# Altium PCB Zigbee.PcbDoc
Units mm, origin at the board's own origin, x right, y up, seen from the top; angles counter-clockwise.
Board outline 41.78 x 49.15 mm, 2 copper layers (Top Layer, Bottom Layer); 2 components, 9 nets, 26 pads, 6 vias.
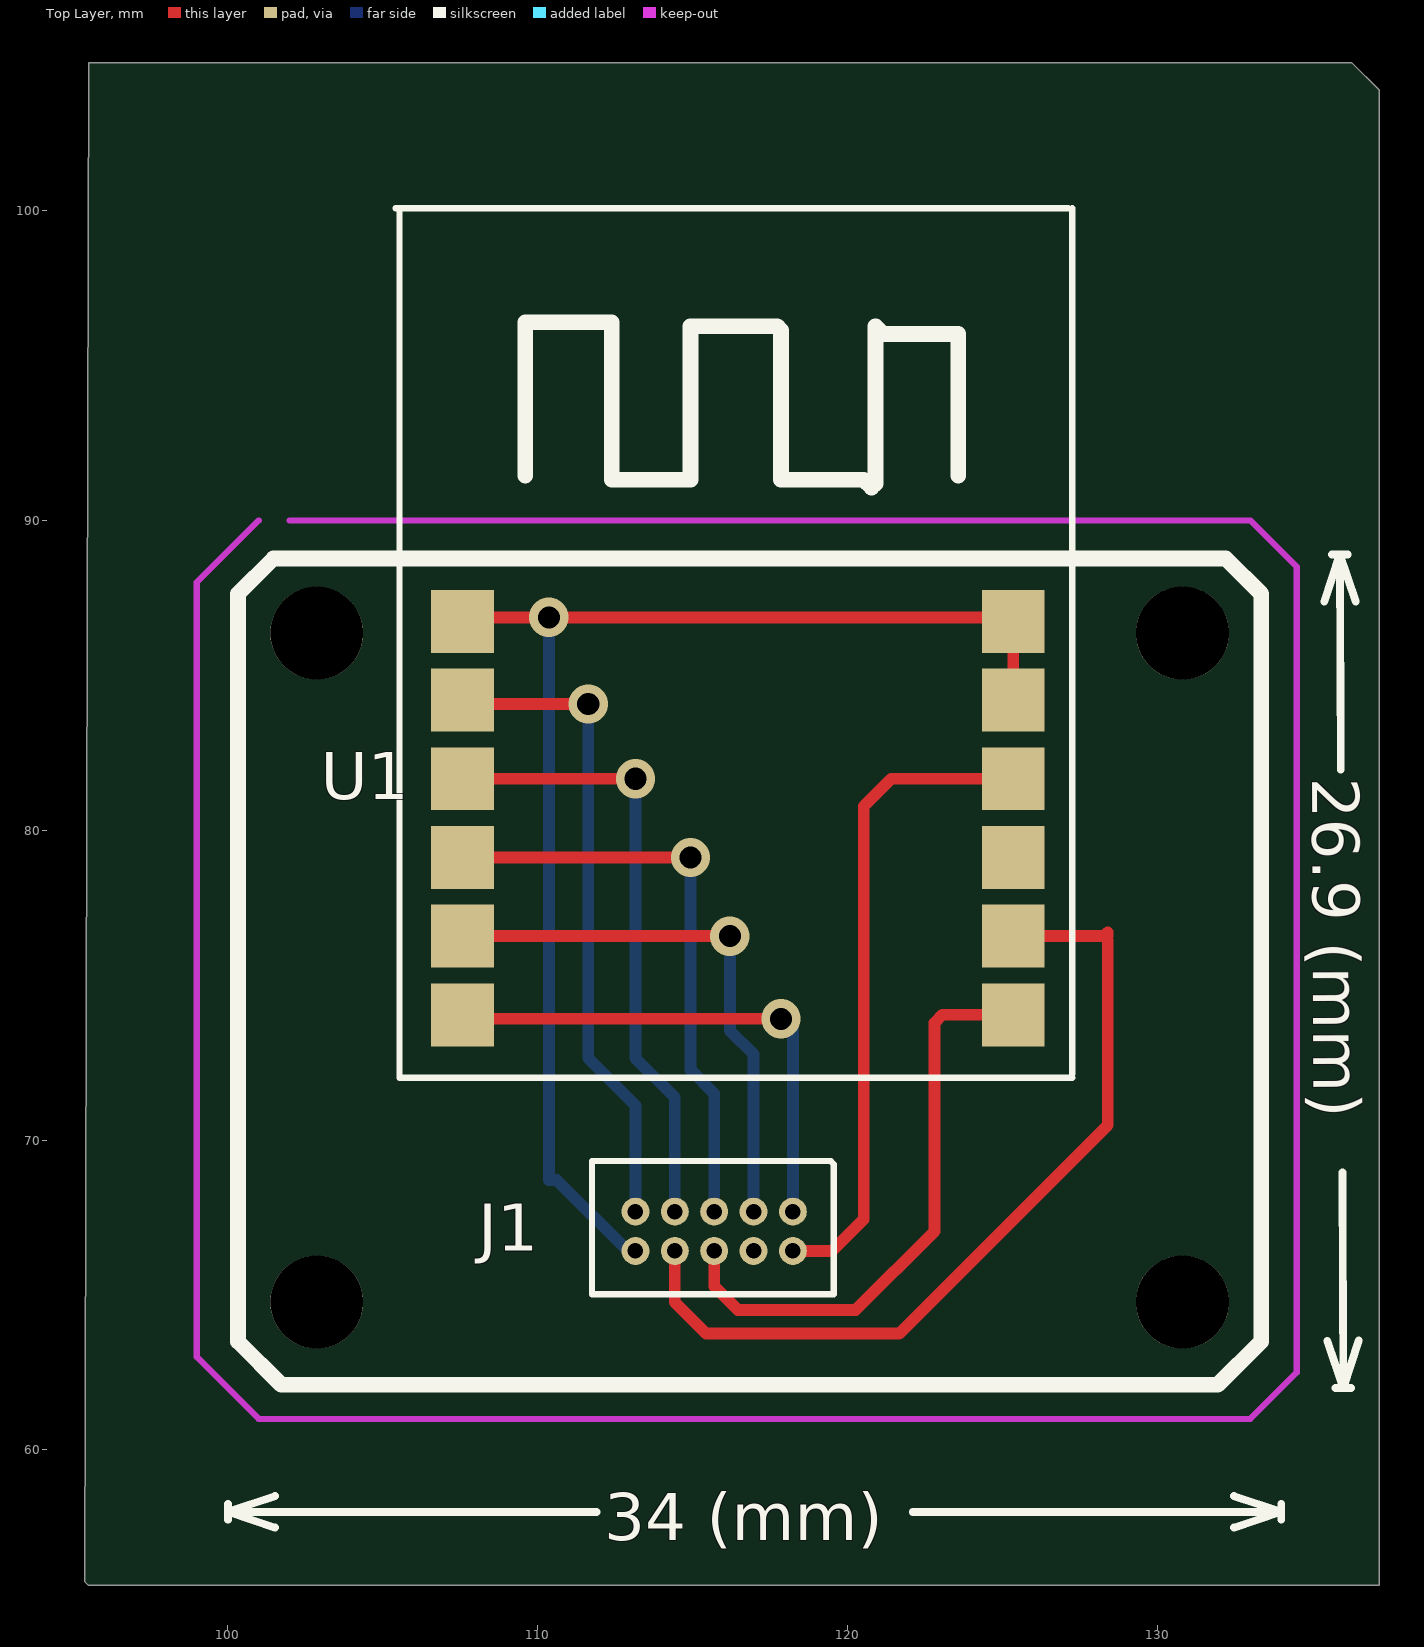
[diagram p0: Top Layer view]
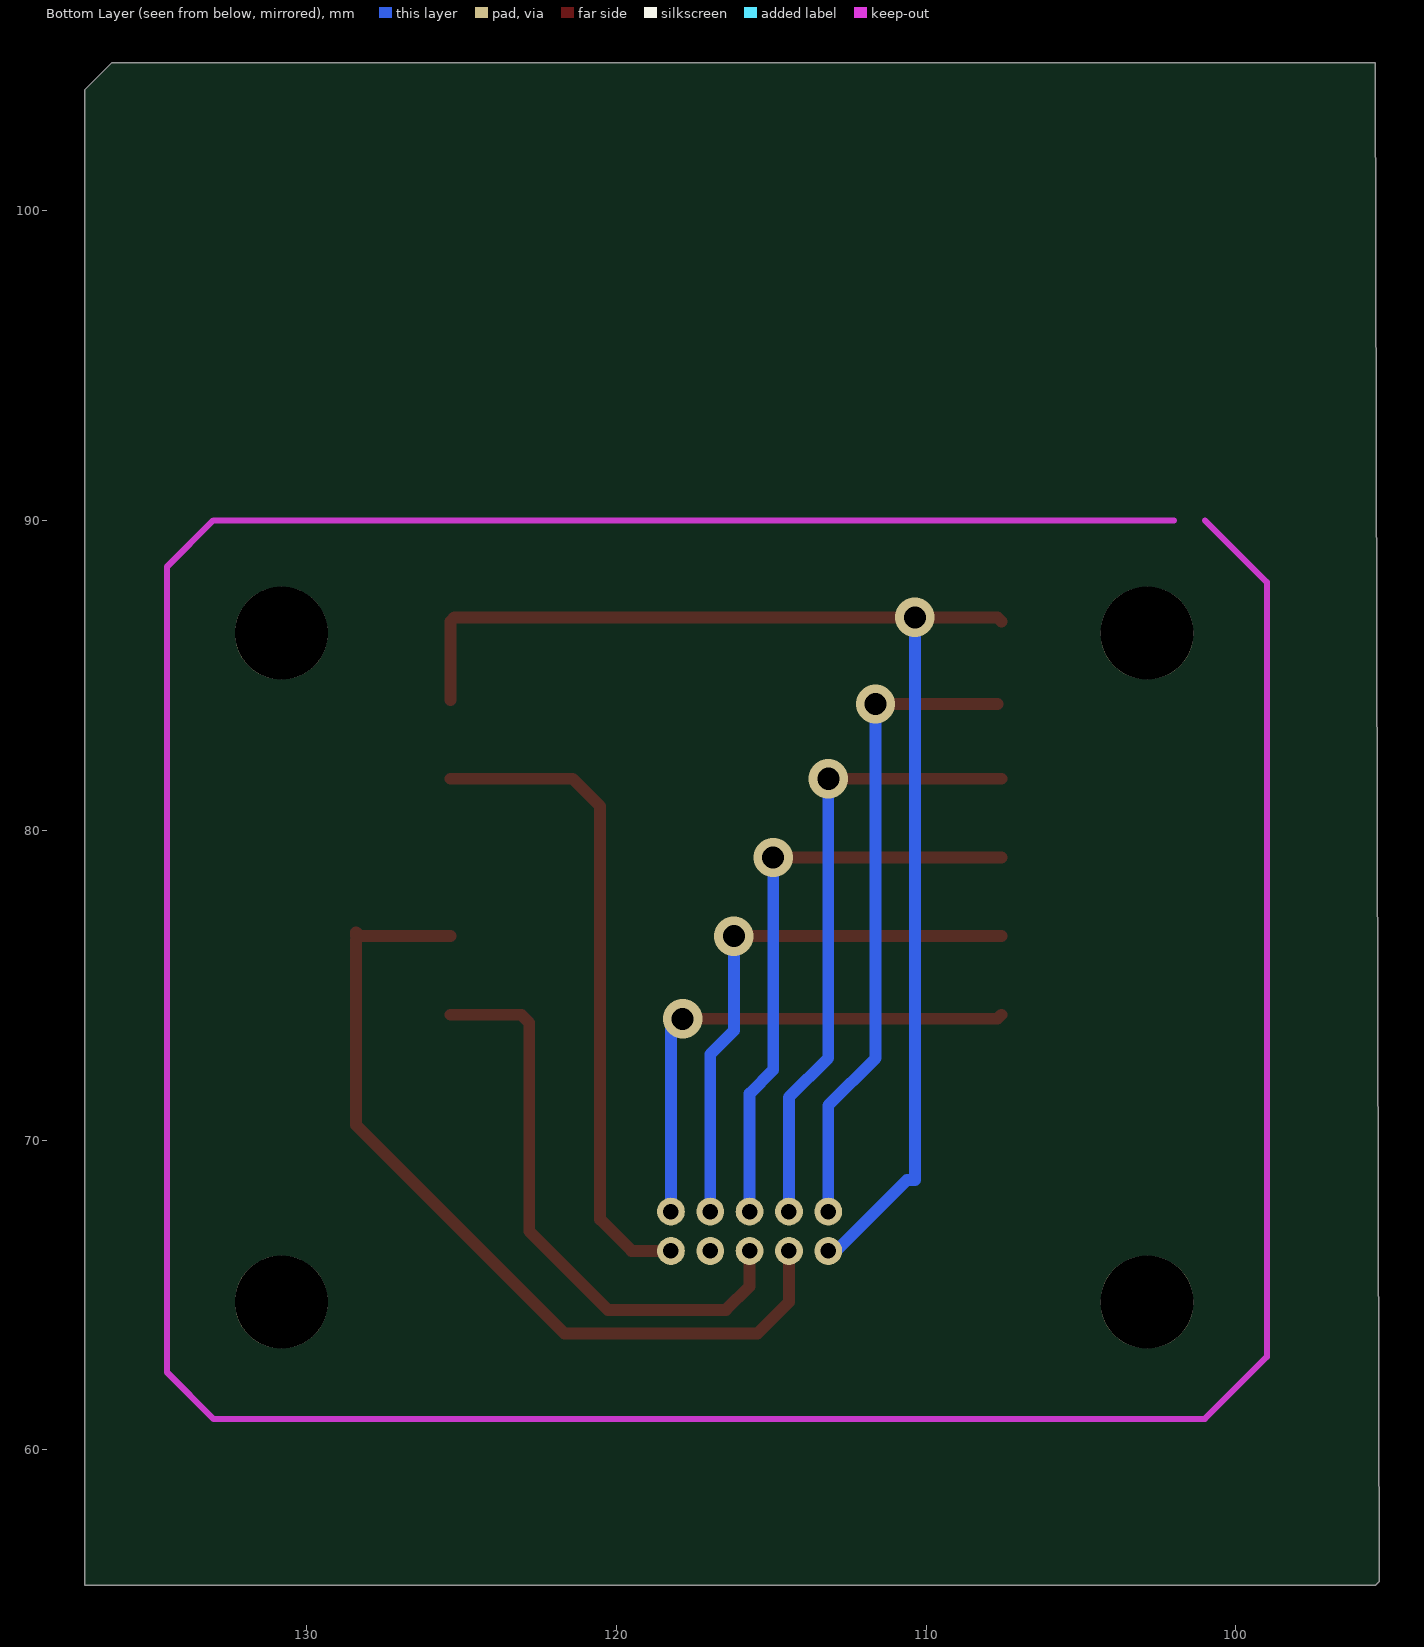
[diagram p1: Bottom Layer view, seen from below]

## Layer stack, top to bottom
Top Layer: signal copper 0.0356
Dielectric: dielectric 0.32, FR-4, Dk 4.8
Bottom Layer: signal copper 0.0356

## Board outline
95.377,55.753 95.504,55.626 137.16,55.626 137.16,103.886 136.271,104.775 95.504,104.775

## Design rules (kind name [scope] priority, off if disabled: settings)
Clearance [All] p1: gap=0.254
PolygonConnect [All] p1: connectstyle=Relief reliefconductorwidth=0.254 reliefentries=4 polygonreliefangle="90 Angle" airgapwidth=0.254
RoutingVias [All] p1: holewidth=0.711 width=1.27 viastyle="Through Hole" minholewidth=0.711 minwidth=1.27 maxholewidth=0.711 maxwidth=1.27
SolderMaskExpansion [All] p1: expansion=0.102
Width [All] p1: maxlimit=0.508 minlimit=0.254 preferedwidth=0.254
28 further rules are at their usual default settings.

## Components (designator, comment, footprint, x,y, rotation, side; value= is the part's Value field where it differs from the comment)
J1 "" "Header2x5 1.27mm pitch" 113.157,66.421 r0 top
U1 "" MFR24J40MA 107.569,86.741 r0 top

## Footprints (in the part's own frame and the unit in brackets; to place one, negate y for a bottom-side part, rotate by r counter-clockwise, add the part's x,y. Pads: shape width x height; smd on the part's side, far side on the other; paste and mask are expansions set on the pad)
"Header2x5 1.27mm pitch" [mm]
  round 0.9 hole 0.5: 1(0,0) 2(0,1.27) 3(1.27,0) 4(1.27,1.27) 5(2.54,0) 6(2.54,1.27) 7(3.81,0) 8(3.81,1.27) 9(5.08,0) 10(5.08,1.27)
  silkscreen extent -1.4,-1.4 6.4,2.9
MFR24J40MA [mil]
  rect 80x80 smd: 1(0,0) 2(0,-100) 3(0,-200) 4(0,-300) 5(0,-400) 6(0,-500) 7(700,-500) 8(700,-400) 9(700,-300) 10(700,-200) 11(700,-100) 12(700,0)
  silkscreen extent -85,-580 775,525

## Free pads (board coordinates)
  round 3 hole 3: 7(102.87,64.77) 7(102.87,86.36) 7(130.81,64.77) 7(130.81,86.36)

## Via types
v1: diameter 1.27, hole 0.711, Top Layer to Bottom Layer, 6 vias

## Nets (pads, with @x,y where several pads share a name; then routed paths per layer and width w, separated by ;. In a path a pad name is that pad's centre, name@x,y a point inside that pad or via, vN(x,y) a via of type N, cw(c..) or ccw(c..) an arc to the next point about the centre after c; other vN are vias at no path point)
CLK: J1.10 U1.6 | length 16.8
  Top Layer w0.381: U1.6 107.696,73.914 v1(117.856,73.914)
  Bottom Layer w0.381: v1(117.856,73.914) 117.983,73.914 118.237,73.66 J1.10
CS: J1.3 U1.8 | length 28
  Top Layer w0.381: J1.3 114.427,64.77 115.443,63.754 121.666,63.754 128.397,70.485 128.397,76.454 ; U1.8 128.27,76.581 128.397,76.708 128.397,76.581
GND: J1.1 U1.1 U1.11 U1.12 | length 42.3
  Top Layer w0.381: U1.1 107.696,86.868 v1(110.363,86.868) 125.222,86.868 U1.12 U1.11
  Bottom Layer w0.381: v1(110.363,86.868) 110.363,68.707 110.617,68.707 112.903,66.421 J1.1
INT: J1.6 U1.4 | length 19.1
  Top Layer w0.381: U1.4 v1(114.935,79.121)
  Bottom Layer w0.381: v1(114.935,79.121) 114.935,72.263 115.697,71.501 J1.6
Reset: J1.2 U1.2 | length 21
  Top Layer w0.381: U1.2@107.696,84.074 v1(111.633,84.074)
  Bottom Layer w0.381: v1(111.633,84.074) 111.633,72.644 113.157,71.12 J1.2
SDI: J1.8 U1.5 | length 17.8
  Top Layer w0.381: U1.5 v1(116.205,76.581)
  Bottom Layer w0.381: v1(116.205,76.581) 116.205,73.533 116.967,72.771 J1.8
SDO: J1.5 U1.7 | length 19
  Top Layer w0.381: J1.5 115.697,65.278 116.459,64.516 120.269,64.516 122.809,67.056 122.809,73.787 123.063,74.041 U1.7
VCC: J1.9 U1.10 | length 21.2
  Top Layer w0.381: J1.9 119.507,66.421 120.523,67.437 120.523,80.772 121.412,81.661 U1.10
Wave: J1.4 U1.3 | length 20.1
  Top Layer w0.381: U1.3 v1(113.157,81.661)
  Bottom Layer w0.381: v1(113.157,81.661) 113.157,72.644 114.427,71.374 J1.4
pads on no net: J1.7 U1.9

## Keep-outs
Keep-Out Layer:
  lines w0.2: 101,90 99,88 99,63 101,61 133,61 134.5,62.5 134.5,88.5 133,90 102,90

## Silkscreen, mask and mechanical layers (free items; w line width, h text height)
Top Overlay:
  lines w0.254: 100,57.746 100,58.254 ; 101.524,57.492 100,58 ; 101.524,58.508 100,58 ; 111.896,58 100,58 ; 122.104,58 134,58 ; 132.476,57.492 134,58 ; 132.476,58.508 134,58 ; 134,57.746 134,58.254 ; 135.388,87.374 135.89,88.9 ; 135.486,63.522 136,62 ; 135.636,88.899 136.144,88.901 ; 135.746,61.999 136.254,62.001 ; 135.918,81.95 135.89,88.9 ; 135.972,68.95 136,62 ; 136.404,87.378 135.89,88.9 ; 136.502,63.526 136,62
  lines w0.508: 100.33,63.5 101.727,62.103 131.953,62.103 133.35,63.5 133.35,87.63 132.207,88.773 105.537,88.773 101.473,88.773 100.33,87.63 100.33,63.5
  text "26.9 (mm)" at 135.005,81.693 h1.52 r270.23
  text "34 (mm)" at 112.15,57.086 h1.52